# Altium PCB Twintig-Tap-Pads.PcbDoc
Units mm, origin at the board's own origin, x right, y up, seen from the top; angles counter-clockwise.
Board outline 200 x 100 mm, 4 copper layers (Top Layer, Int1 (GND), Int2 (PWR), Bottom Layer), stack 1.369 mm thick; 70 components, 41 nets, 257 pads, 101 vias.
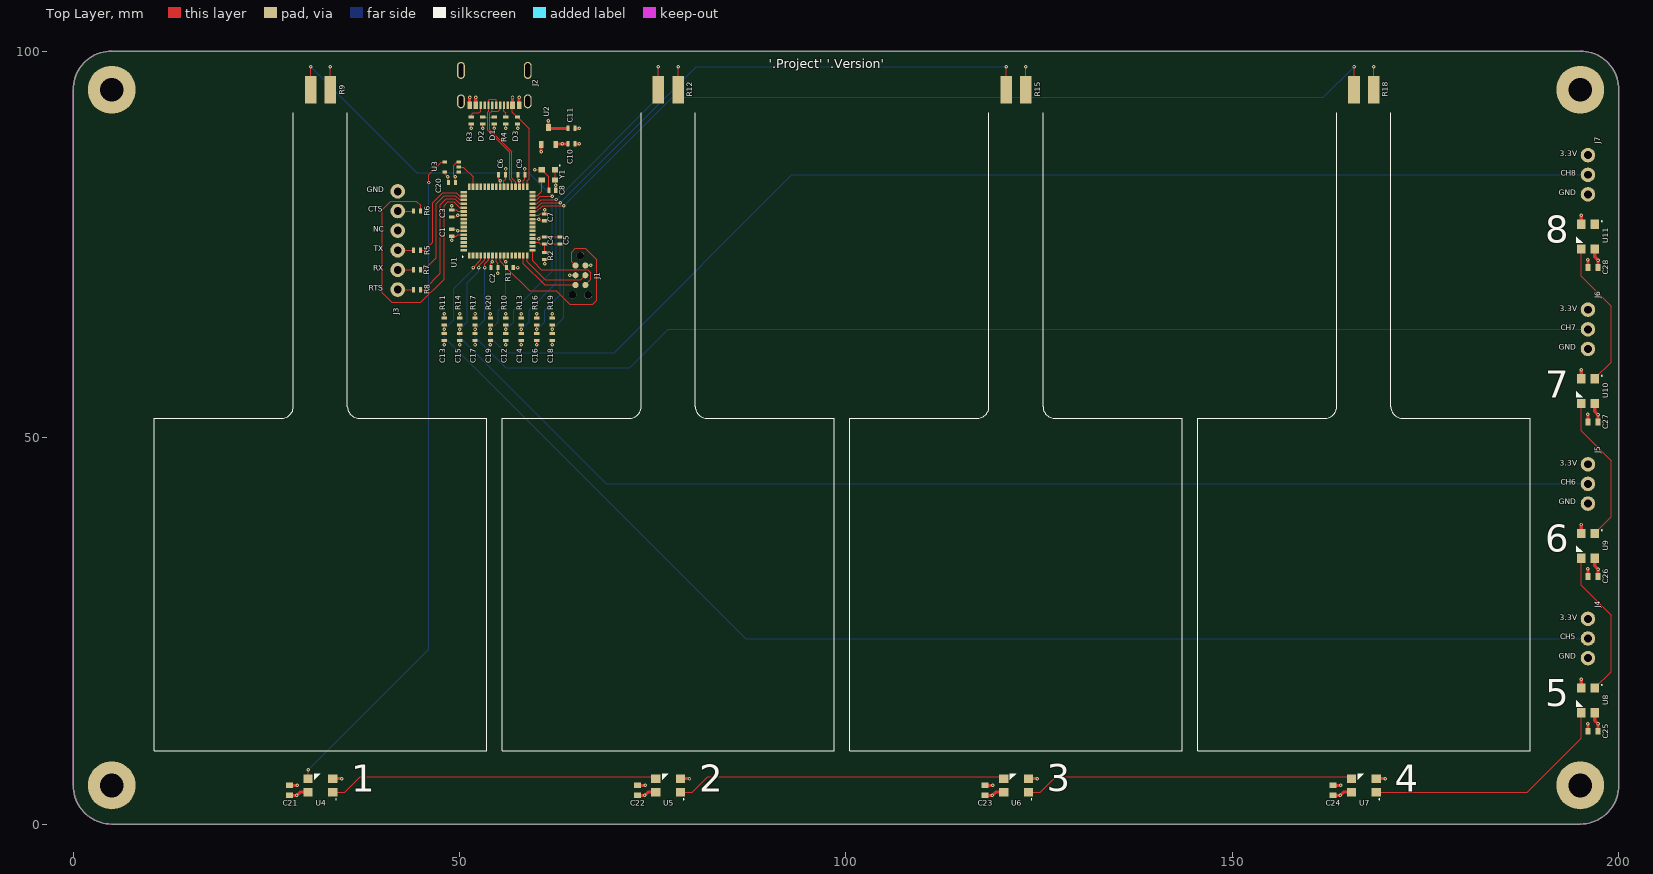
[diagram p0: Top Layer view]
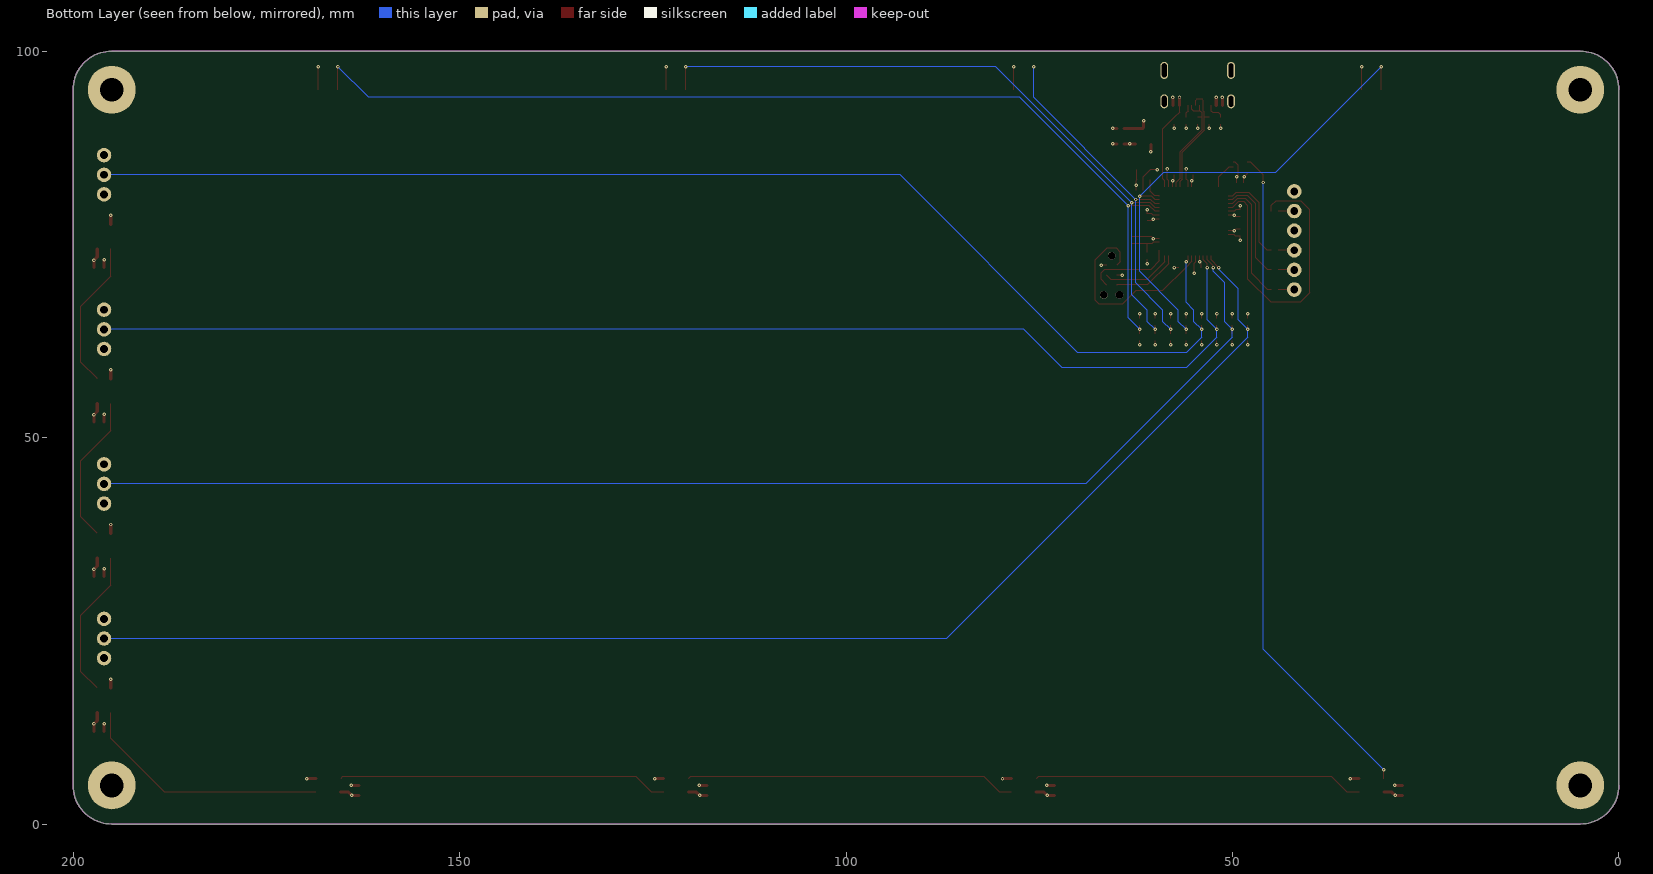
[diagram p1: Bottom Layer view, seen from below]
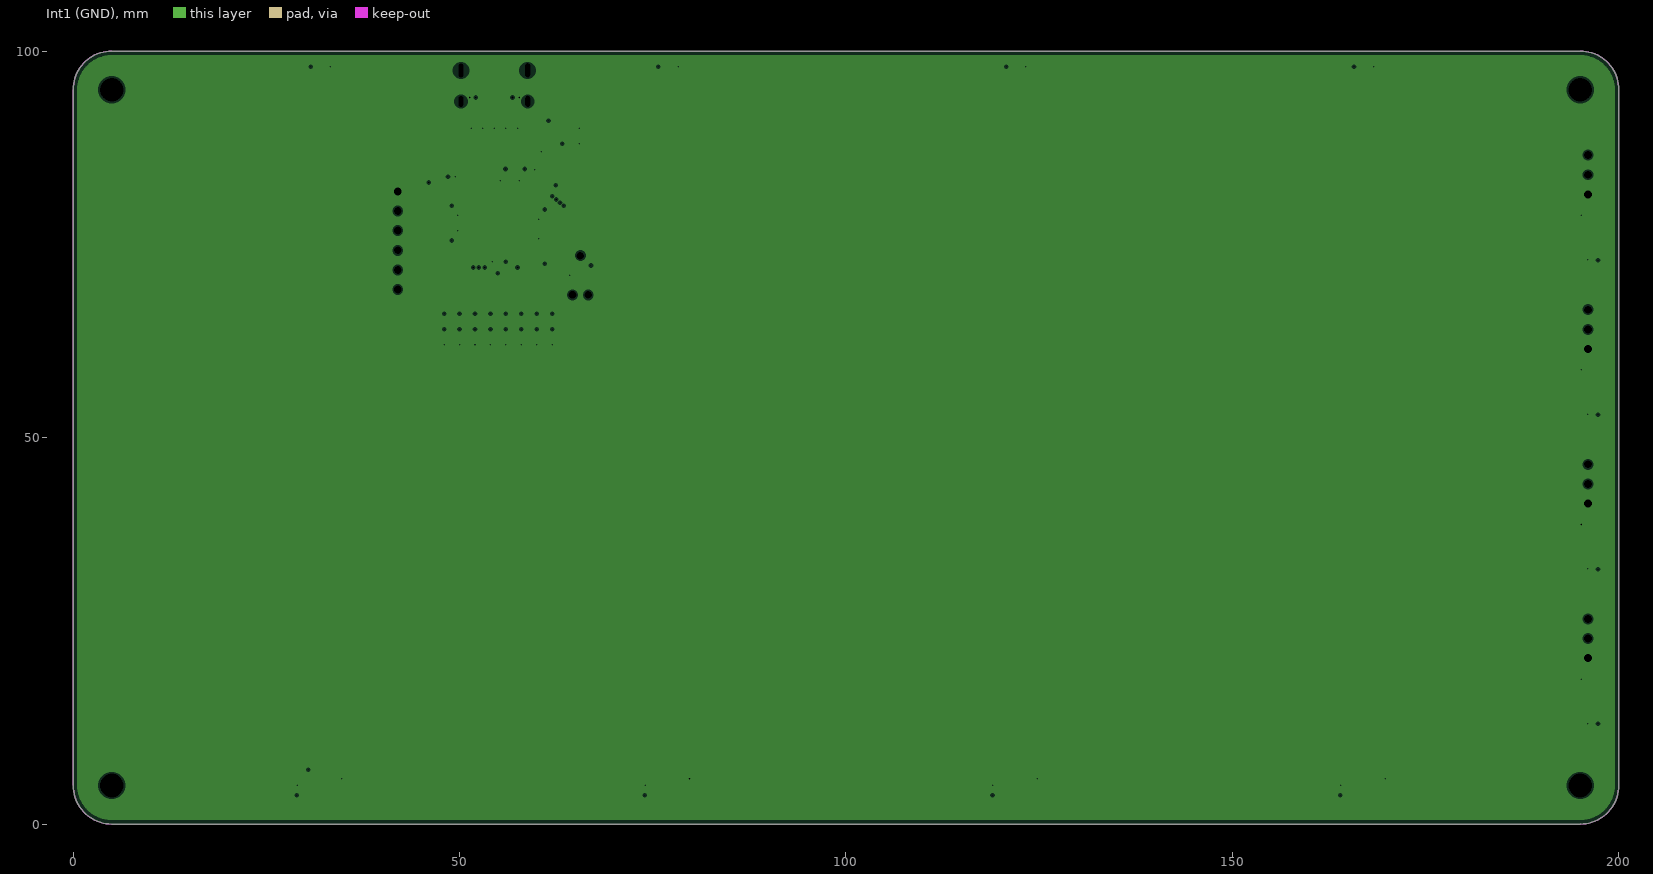
[diagram p2: Int1 (GND), clearances drawn from the general rule]
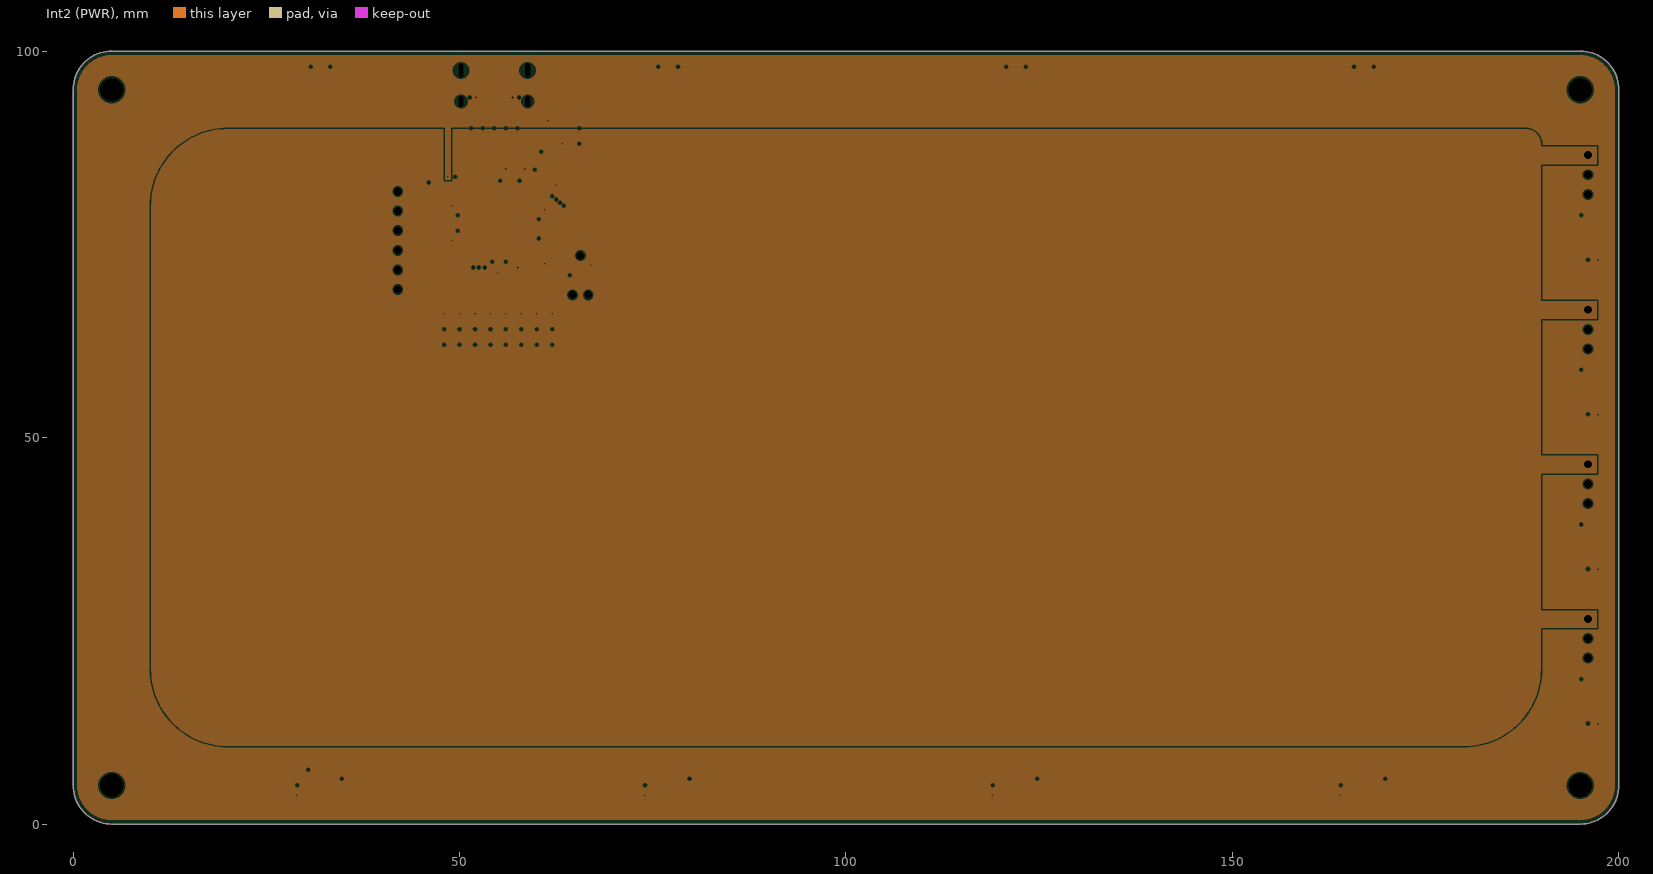
[diagram p3: Int2 (PWR), clearances drawn from the general rule]
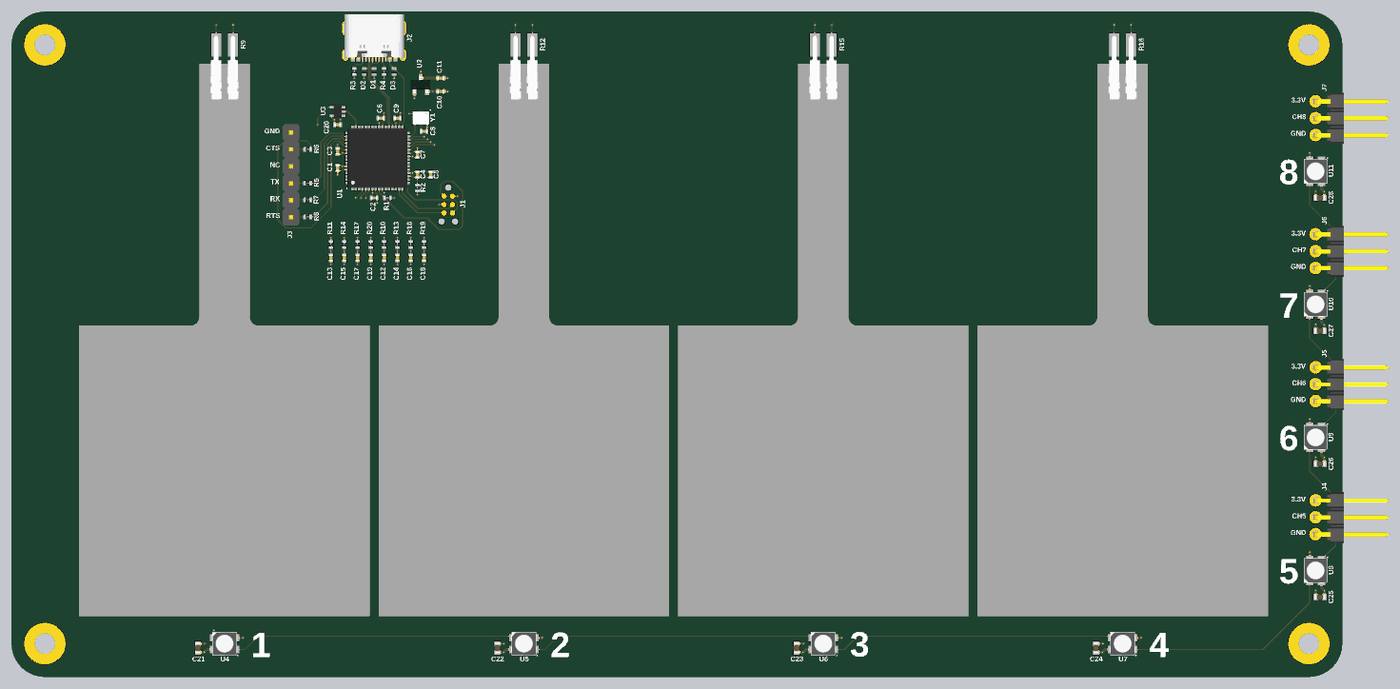
[diagram p4: 3D render of the assembled board from above, using the file's embedded part models]

## Layer stack, top to bottom
Top Solder: solder mask 0.0254, SM-001, Dk 4
Top Layer: signal copper 0.035
Dielectric 1: prepreg 0.1295, PP-017, Dk 4.3
Dielectric 2: prepreg 0.1295, PP-017, Dk 4.3
Int1 (GND): plane copper 0.035, net GND
Dielectric 3: core 0.7112, Core-039, Dk 4.8
Int2 (PWR): plane copper 0.035, net (Multiple Nets)
Dielectric 4: prepreg 0.1295, PP-017, Dk 4.3
Dielectric 5: prepreg 0.1295, PP-017, Dk 4.3
Bottom Layer: signal copper 0.035
Bottom Solder: solder mask 0.0254, SM-001, Dk 4

## Board outline
0,5 0,95 cw(c5,95) 5,100 195,100 cw(c195,95) 200,95 200,5 cw(c195,5) 195,0 5,0 cw(c5,5)

## Design rules (kind name [scope] priority, off if disabled: settings)
Clearance [All] p1: gap=0.1 ignorepadtopadclearanceinfootprint=FALSE except(0: Arc-Hole Track-Hole SMDPad-Hole THPad-Hole Via-Hole Fill-Hole Poly-Hole Region-Hole Text-Hole)
DiffPairsRouting [All] p1: maxlimit=0.254 minlimit=0.1 mostfreqgap=0.1 toplayer_minwidth=0.1 toplayer_maxwidth=0.381 toplayer_prefwidth=0.1 bottomlayer_minwidth=0.1 bottomlayer_maxwidth=0.381 bottomlayer_prefwidth=0.1 maxuncoupledlength=12.7
HoleSize [All] p1: absolutevalues=TRUE maxlimit=10 minlimit=0.025 maxpercent=80.000 minpercent=20.000
MinimumSolderMaskSliver [All] p1: minsoldermaskwidth=0
PlaneClearance [All] p1: clearance=0.2
PlaneConnect [All] p1: planeconnectstyle=Direct reliefexpansion=0.508 reliefentries=4 reliefconductorwidth=0.254 reliefairgap=0.254
PolygonConnect [All] p1: thpad.connectstyle=Relief thpad.reliefconductorwidth=0.254 thpad.reliefentries=4 thpad.polygonreliefangle="90 Angle" thpad.airgapwidth=0.1 smdpad.connectstyle=Relief smdpad.reliefconductorwidth=0.254 smdpad.reliefentries=4 smdpad.polygonreliefangle="90 Angle" smdpad.airgapwidth=0.1 via.connectstyle=Direct via.reliefconductorwidth=0.254 via.reliefentries=4 via.polygonreliefangle="90 Angle" via.airgapwidth=0.254
RoutingVias [All] p1: holewidth=0.711 width=1.27 viastyle="Through Hole" minholewidth=0.15 minwidth=0.35 maxholewidth=0.711 maxwidth=1.27
SilkToSolderMaskClearance [IsPad] p1: minsilkscreentomaskgap=0.1 clearancetoexposedcopper=TRUE
SolderMaskExpansion [All] p1: expansion=0.102 istentingtop=FALSE
SupplyNets "Schematic Supply Nets_4" [InNet('GND')] p1: voltage=0.000
SupplyNets "Schematic Supply Nets_1" [InNet('3.3V')] p2: voltage=0.000
SupplyNets "Schematic Supply Nets" [InNet('VBUS')] p3: voltage=0.000
Width [All] p1: maxlimit=1 minlimit=0.05 preferedwidth=0.1
24 further rules are at their usual default settings.

## Classes and differential pairs
component class "Serial Header": J3 R5 R6 R7 R8
component class LEDs: C20 C21 C22 C23 C24 C25 C26 C27 C28 U3 U4 U5 U6 U7 U8 U9 U10 U11
component class USB-C: D1 D2 D3 J2 R3 R4
component class PIC32MZ: C1 C2 C3 C4 C5 C6 C7 C8 C9 J1 R1 R2 U1 Y1
component class FSRs: C12 C13 C14 C15 C16 C17 C18 C19 J4 J5 J6 J7 R9 R10 R11 R12 R13 R14 R15 R16 R17 R18 R19 R20
component class "Voltage Regulator": C10 C11 U2
differential pair D: +D_P -D_N

## Components (designator, comment, footprint, x,y, rotation, side; value= is the part's Value field where it differs from the comment)
C1 "100nF" "Capacitor 0402" 49,76.5 r270 top
C2 "100nF" "Capacitor 0402" 54.5,72 r180 top
C3 "100nF" "Capacitor 0402" 49,79 r270 top
C4 "10uF" "Capacitor 0402" 61,75.5 r270 top
C5 "100nF" "Capacitor 0402" 63,75.5 r270 top
C6 "100nF" "Capacitor 0402" 55.5,84 r180 top
C7 "100nF" "Capacitor 0402" 61,78.5 r270 top
C8 "100nF" "Capacitor 0402" 62,82 r0 top
C9 "100nF" "Capacitor 0402" 58,84 r180 top
C10 "10uF" "Capacitor 0402" 64.5,88 r180 top
C11 "10uF" "Capacitor 0402" 64.5,90 r180 top
C12 "220pF" "Capacitor 0402" 56,63 r90 top
C13 "220pF" "Capacitor 0402" 48,63 r90 top
C14 "220pF" "Capacitor 0402" 58,63 r90 top
C15 "220pF" "Capacitor 0402" 50,63 r90 top
C16 "220pF" "Capacitor 0402" 60,63 r90 top
C17 "220pF" "Capacitor 0402" 52,63 r90 top
C18 "220pF" "Capacitor 0402" 62,63 r90 top
C19 "220pF" "Capacitor 0402" 54,63 r90 top
C20 "100nF" "Capacitor 0402" 49,83 r180 top
C21 "10uF" "Capacitor 0603" 28,4.35 r270 top
C22 "10uF" "Capacitor 0603" 73,4.35 r270 top
C23 "10uF" "Capacitor 0603" 118,4.35 r270 top
C24 "10uF" "Capacitor 0603" 163,4.35 r270 top
C25 "10uF" "Capacitor 0603" 196.65,12 r0 top
C26 "10uF" "Capacitor 0603" 196.65,32 r0 top
C27 "10uF" "Capacitor 0603" 196.65,52 r0 top
C28 "10uF" "Capacitor 0603" 196.65,72 r0 top
D1 "SP0402B-ULC-01ETG" "Diode TVS 0402" 54.5,91 r270 top
D2 "SP0402B-ULC-01ETG" "Diode TVS 0402" 53,91 r270 top
D3 "SP0402B-ULC-01ETG" "Diode TVS 0402" 57.5,91 r270 top
J1 "DNP" "Tag Connect No Legs" 65.635,73.54 r270 top
J2 "Molex 217179-0001" "Molex 217179-0001" 54.5,97.5 r180 top
J3 "Molex 90121-0766" "Molex 90120-0926" 42,75.5 r0 top
J4 "Molex 90121-0763" "Molex 90121-0763" 196,21.46 r180 top
J5 "Molex 90121-0763" "Molex 90121-0763" 196,41.46 r180 top
J6 "Molex 90121-0763" "Molex 90121-0763" 196,61.46 r180 top
J7 "Molex 90121-0763" "Molex 90121-0763" 196,81.46 r180 top
R1 "10kR" "Resistor 0402" 56.5,72 r0 top
R2 "33R" "Resistor 0402" 61,73.5 r270 top
R3 "5.1kR" "Resistor 0402" 51.5,91 r90 top
R4 "5.1kR" "Resistor 0402" 56,91 r90 top
R5 "470R" "Resistor 0402" 44.5,74.23 r0 top
R6 "470R" "Resistor 0402" 44.5,79.31 r0 top
R7 "470R" "Resistor 0402" 44.5,71.69 r0 top
R8 "470R" "Resistor 0402" 44.5,69.15 r0 top
R9 "Interlink FSR 406" "Interlink FSR 406" 32,95 r90 top locked
R10 "100kR" "Resistor 0402" 56,65 r90 top
R11 "100kR" "Resistor 0402" 48,65 r90 top
R12 "Interlink FSR 406" "Interlink FSR 406" 77,95 r90 top locked
R13 "100kR" "Resistor 0402" 58,65 r90 top
R14 "100kR" "Resistor 0402" 50,65 r90 top
R15 "Interlink FSR 406" "Interlink FSR 406" 122,95 r90 top locked
R16 "100kR" "Resistor 0402" 60,65 r90 top
R17 "100kR" "Resistor 0402" 52,65 r90 top
R18 "Interlink FSR 406" "Interlink FSR 406" 167,95 r90 top locked
R19 "100kR" "Resistor 0402" 62,65 r90 top
R20 "100kR" "Resistor 0402" 54,65 r90 top
U1 "PIC32MZ0512EFE064-I/MR" QFN-64 55,78 r90 top
U2 "TPS7A0533PDBZ" SOT-23 61.5,89 r180 top
U3 "SN74LV1T34DCKR" SOT-323-5 49,85 r270 top
U4 "SK6812MINI-012" SK6812MINI-B-012 32,5 r180 top
U5 "SK6812MINI-012" SK6812MINI-B-012 77,5 r180 top
U6 "SK6812MINI-012" SK6812MINI-B-012 122,5 r180 top
U7 "SK6812MINI-012" SK6812MINI-B-012 167,5 r180 top
U8 "SK6812MINI-012" SK6812MINI-B-012 196,16 r270 top
U9 "SK6812MINI-012" SK6812MINI-B-012 196,36 r270 top
U10 "SK6812MINI-012" SK6812MINI-B-012 196,56 r270 top
U11 "SK6812MINI-012" SK6812MINI-B-012 196,76 r270 top
Y1 "ECS-2520MV-240-DN-TR" "ECS 2x2.5mm" 61.5,84 r180 top

## Footprints (in the part's own frame and the unit in brackets; to place one, negate y for a bottom-side part, rotate by r counter-clockwise, add the part's x,y. Pads: shape width x height; smd on the part's side, far side on the other; paste and mask are expansions set on the pad)
"Capacitor 0402" [mm]
  rect 0.4x0.7 smd: 1(-0.45,0) 2(0.45,0)
  body extent -0.5,-0.25 0.5,0.25, height 0.48
"Capacitor 0603" [mm]
  rect 0.7x0.9 smd: 1(-0.65,0) 2(0.65,0)
  body extent -0.8,-0.4 0.8,0.4, height 0.78
"Diode TVS 0402" [mm]
  rect 0.4x0.7 smd: 1(-0.45,0) 2(0.45,0)
  body extent -0.5,-0.3 0.5,0.3, height 0.4
"ECS 2x2.5mm" [mm]
  rect 0.78x0.68 smd: 1(-0.865,-0.665) 2(0.865,-0.665) 3(0.865,0.665) 4(-0.865,0.665)
  silkscreen extent -1.5,-1.25 -1.4,-1.15, body extent -1.25,-1 1.25,1, height 0.82
"Interlink FSR 406" [mm]
  rect 3.5x1.5 smd: 1(0,1.27) 2(0,-1.27)
  silkscreen extent -85.5,-21.5 -3,21.5, body extent -85.88,-21.84 1.36,21.84, height 0.89
"Molex 90120-0926" [mil]
  round 74 hole 40: 1(0,250) 2(0,150) 3(0,50) 4(0,-50) 5(0,-150) 6(0,-250)
  body extent -49,-301 49,299, height 336
"Molex 90121-0763" [mil]
  round 74 hole 40: 1(0,0) 2(0,-100) 3(0,-200)
  body extent -433,-248 13,52, height 142
"Molex 217179-0001" [mm]
  rect 0.6x1 smd: "A1 B12"(-3.2,4.5) "A4 B9"(-2.35,4.5) "B1 A12"(3.2,4.5) "B4 A9"(2.4,4.5)
  rect 0.3x1 smd: A5(-1.25,4.5) A6(-0.25,4.5) A7(0.25,4.5) A8(1.25,4.5) B5(1.75,4.5) B6(0.75,4.5) B7(-0.75,4.5) B8(-1.75,4.5)
  oval 1x1.8 hole 0.6 slot 1.4 at 90 deg: Shell(-4.32,4) Shell(4.32,4)
  oval 1x2.2 hole 0.6 slot 1.8 at 90 deg: Shell(-4.32,0) Shell(4.32,0)
  body extent -4.47,-2.13 4.47,4.63, height 3.27
QFN-64 [mm]
  rect 0.8x0.35 smd: 1(-4.45,3.75) 2(-4.45,3.25) 3(-4.45,2.75) 4(-4.45,2.25) 5(-4.45,1.75) 6(-4.45,1.25) 7(-4.45,0.75) 8(-4.45,0.25) 9(-4.45,-0.25) 10(-4.45,-0.75) 11(-4.45,-1.25) 12(-4.45,-1.75) 13(-4.45,-2.25) 14(-4.45,-2.75) 15(-4.45,-3.25) 16(-4.45,-3.75) 33(4.45,-3.75) 34(4.45,-3.25) 35(4.45,-2.75) 36(4.45,-2.25) 37(4.45,-1.75) 38(4.45,-1.25) 39(4.45,-0.75) 40(4.45,-0.25) 41(4.45,0.25) 42(4.45,0.75) 43(4.45,1.25) 44(4.45,1.75) 45(4.45,2.25) 46(4.45,2.75) 47(4.45,3.25) 48(4.45,3.75)
  rect 0.35x0.8 smd: 17(-3.75,-4.45) 18(-3.25,-4.45) 19(-2.75,-4.45) 20(-2.25,-4.45) 21(-1.75,-4.45) 22(-1.25,-4.45) 23(-0.75,-4.45) 24(-0.25,-4.45) 25(0.25,-4.45) 26(0.75,-4.45) 27(1.25,-4.45) 28(1.75,-4.45) 29(2.25,-4.45) 30(2.75,-4.45) 31(3.25,-4.45) 32(3.75,-4.45) 49(3.75,4.45) 50(3.25,4.45) 51(2.75,4.45) 52(2.25,4.45) 53(1.75,4.45) 54(1.25,4.45) 55(0.75,4.45) 56(0.25,4.45) 57(-0.25,4.45) 58(-0.75,4.45) 59(-1.25,4.45) 60(-1.75,4.45) 61(-2.25,4.45) 62(-2.75,4.45) 63(-3.25,4.45) 64(-3.75,4.45)
  silkscreen extent -4.65,4.55 -4.55,4.65, body extent -4.52,-4.52 4.52,4.52, height 0.9
"Resistor 0402" [mm]
  rect 0.4x0.7 smd: 1(-0.45,0) 2(0.45,0)
  body extent -0.5,-0.25 0.5,0.25, height 0.34
SK6812MINI-B-012 [mm]
  rect 1.2x1.1 smd: 1(-1.6,0.875) 2(-1.6,-0.875) 3(1.6,-0.875) 4(1.6,0.875)
  silkscreen extent -2.05,-1.5 0.8,1.85, body extent -1.95,-1.75 1.95,1.75, height 1
SOT-23 [mm]
  rect 0.6x0.9 smd: 1(0.95,1.1) 2(-0.95,1.1) 3(0,-1.1)
  body extent -1.5,-1.25 1.5,1.25, height 1.06
SOT-323-5 [mm]
  rect 0.35x0.6 smd: 1(0.65,0.9) 2(0,0.9) 3(-0.65,0.9) 4(-0.65,-0.9) 5(0.65,-0.9)
  body extent -1,-1.05 1,1.05, height 0.95
"Tag Connect No Legs" [mil]
  round 31 smd paste-99999: 1(50,-25) 2(50,25) 3(100,-25) 4(100,25) 5(150,-25) 6(150,25)
  round 39 hole 39 unplated: Pin(0,0) Pin(200,-40) Pin(200,40)

## Part data
C1 C2 C3 C4 C5 C6 C7 C8 C9 C10 C11 C12 C13 C14 C15 C16 C17 C18 C19 C20 C21 C22 C23 C24 C25 C26 C27 C28: library part Capacitor
D1 D2 D3: library part "Diode TVS"
J1: library part "MPLAB ICSP"
J2: library part "USB-C Receptacle (16 Pin)"
J3: library part "FTDI Breakout"
R1 R2 R3 R4 R5 R6 R7 R8 R10 R11 R13 R14 R16 R17 R19 R20: library part Resistor
U1: library part PIC32MZ2048EFH064
U3: library part "SN74LVC1xxx (1 Input)"
U4 U5 U6 U7 U8 U9 U10 U11: library part SK6812MINI-B-012
Y1: library part Oscillator

## Free pads (board coordinates)
  round 6.2 hole 3.1: "Mounting Hole"(5,5) "Mounting Hole"(5,95) "Mounting Hole"(195,5) "Mounting Hole"(195,95)

## Via types
v1: diameter 0.45, hole 0.2, Top Layer to Bottom Layer, tented both sides, 101 vias

## Nets (pads, with @x,y where several pads share a name; then routed paths per layer and width w, separated by ;. In a path a pad name is that pad's centre, name@x,y a point inside that pad or via, vN(x,y) a via of type N, cw(c..) or ccw(c..) an arc to the next point about the centre after c; other vN are vias at no path point)
3.3V: C1.2 C2.1 C3.1 C6.1 C7.1 C8.2 C9.1 C10.2 J1.2 J4.3 J5.3 J6.3 J7.3 R1.2 R2.2 R10.2 R11.2 R13.2 R14.2 R16.2 R17.2 R19.2 R20.2 U1.8 U1.26 U1.34 U1.39 U1.54 U1.60 U2.2 Y1.1 Y1.4 | length 24.3
  Top Layer w0.15: R11.2 v1(48,66) ; v1(49,75.5) C1.2 49.55,76.05 49.75,76.25 U1.60 ; v1(49,80) C3.1 49.55,79.45 49.75,79.25 U1.54 ; R14.2 v1(50,66) ; R17.2 v1(52,66) ; R20.2 v1(54,66) ; U1.8 54.75,72.75 54.95,72.55 C2.1 v1(54.95,71.25) ; U1.39 55.75,83.25 55.95,83.45 C6.1 v1(55.95,84.75) ; R10.2 v1(56,66) ; R1.2 v1(57.5,72) ; R13.2 v1(58,66) ; U1.34 58.25,83.25 58.45,83.45 C9.1 v1(58.45,84.75) ; U1.26 60.25,78.75 60.45,78.95 C7.1 v1(61,79.5) ; R16.2 v1(60,66) ; v1(61,72.5) R2.2 ; R19.2 v1(62,66) ; Y1.1 Y1.4 62.45,83.25 C8.2 ; U2.2 U2.2@62.55,88 ; J1.2 v1(67,72.27)
  Top Layer w0.4: U2.2@62.55,88 C10.2
  other v1: 62.45,82.625 63.3,88
AVDD: C4.2 C5.2 R2.1 U1.19 | length 4.7
  Top Layer w0.15: U1.19 60.25,75.25 60.45,75.05 C4.2 R2.1 ; C4.2 C5.2
CC1: J2.A5 R4.2 | length 1.7
  Top Layer w0.15: J2.A5 55.75,92.25 56,92 R4.2
CC2: J2.B5 R3.2 | length 2.5
  Top Layer w0.15: R3.2 51.5,91.75 51.75,92 52.5,92 52.75,92.25 J2.B5
CH1: C12.2 R9.1 R10.1 U1.30 | length 64.8
  Top Layer w0.15: R9.1 v1(30.73,98) ; C12.2 v1(56,64) R10.1 ; U1.30 60,80.75 60.45,81.2 v1(62,81.2)
  Bottom Layer w0.15: v1(30.73,98) 44.48,84.25 58.95,84.25 v1(62,81.2) 62,71.5 57,66.5 57,65 v1(56,64)
CH2: C14.2 R12.1 R13.1 U1.29 | length 48.7
  Top Layer w0.15: C14.2 v1(58,64) R13.1 ; U1.29 60,80.25 60.55,80.8 v1(62.5,80.8) ; R12.1 v1(75.73,98)
  Bottom Layer w0.15: v1(58,64) 59,65 59,66.5 62.5,70 v1(62.5,80.8) 75.73,94.03 v1(75.73,98)
CH3: C16.2 R15.1 R16.1 U1.28 | length 90.6
  Top Layer w0.15: U1.28 60,79.75 60.65,80.4 v1(63,80.4) ; C16.2 v1(60,64) R16.1 ; R15.1 v1(120.73,98)
  Bottom Layer w0.15: v1(60,64) 61,65 61,66.5 63,68.5 v1(63,80.4) 80.6,98 v1(120.73,98)
CH4: C18.2 R18.1 R19.1 U1.27 | length 134.8
  Top Layer w0.15: U1.27 60,79.25 60.75,80 v1(63.5,80) ; C18.2 v1(62,64) R19.1 ; R18.1 v1(165.73,98)
  Bottom Layer w0.15: v1(62,64) 63.5,65.5 v1(63.5,80) 77.5,94 161.73,94 v1(165.73,98)
CH5: C13.2 J4.2 R11.1 U1.4 | length 177.8
  Top Layer w0.15: C13.2 v1(48,64) R11.1 ; v1(51.75,72) 52.75,73 U1.4
  Bottom Layer w0.15: v1(51.75,72) 51.724,71.974 51.724,71.724 49.25,69.25 49.25,65.25 v1(48,64) 48,63 87,24 J4.2
CH6: C15.2 J5.2 R14.1 U1.5 | length 166.9
  Top Layer w0.15: C15.2 v1(50,64) R14.1 ; v1(52.5,72) 52.5,72.25 53.25,73 U1.5
  Bottom Layer w0.15: v1(52.5,72) 52.5,71.5 51,70 51,65 v1(50,64) 50,63 69,44 J5.2
CH7: C17.2 J6.2 R17.1 U1.6 | length 160.1
  Top Layer w0.15: C17.2 v1(52,64) R17.1 ; v1(53.25,72) 53.25,72.5 53.75,73 U1.6
  Bottom Layer w0.15: v1(53.25,72) 53.25,65.25 v1(52,64) 52,63 56,59 72,59 77,64 J6.2
CH8: C19.2 J7.2 R20.1 U1.10 | length 164.9
  Top Layer w0.15: C19.2 v1(54,64) R20.1 ; U1.10 55.75,73 v1(56,72.75)
  Bottom Layer w0.15: v1(56,72.75) 56,67.5 55,66.5 55,65 v1(54,64) 54,63 56,61 70,61 93,84 J7.2
CLKI: U1.31 Y1.3 | length 2.9
  Top Layer w0.15: U1.31 59.475,81.275 60.025,81.275 60.635,81.885 Y1.3
CTS: R8.2 U1.52 | length 15.9
  Top Layer w0.15: R8.2 45.15,69.15 45.4,69.15 47.5,71.25 47.5,80.1 48.3,80.9 49.35,80.9 50,80.25 U1.52
"CTS R": J3.2 R6.1 | length 2.1
  Top Layer w0.15: J3.2 R6.1
D_N: D1.1 J2.A7 J2.B7 U1.36 | length 14.4
  Top Layer w0.15: J2.A7 54.25,92.35 54.15,92.25 ; D1.1 53.9,91.45 ; J2.B7 55.25,92.5 55,92.25 54.15,92.25 ; U1.36 57.25,83.05 56.75,83.55 56.75,87 53.9,89.85 53.9,91.45 ; 53.9,91.45 53.9,92 54.15,92.25
D_P: D2.1 J2.A6 J2.B6 U1.37 | length 14.9
  Top Layer w0.15: D2.1 53.6,91.45 53.65,91.5 ; J2.A6 54.75,93.662 54.662,93.75 53.838,93.75 53.75,93.662 J2.B6 53.75,92.25 53.65,92.15 53.65,91.5 ; U1.37 56.75,83.15 56.5,83.4 56.5,86.896 53.65,89.746 53.65,91.5
Debug: J1.6 U1.17 | length 11.5
  Top Layer w0.15: U1.17 59.45,72.85 60.599,71.701 66.599,71.701 67,71.3 67,70.46 J1.6
DOUT1: U4.1 U5.3 | length 42.7
  Top Layer w0.15: U4.1 35.125,4.125 37.125,6.125 75.15,6.125 U5.3
DOUT2: U5.1 U6.3 | length 42.7
  Top Layer w0.15: U5.1 80.125,4.125 82.125,6.125 120.15,6.125 U6.3
DOUT3: U6.1 U7.3 | length 42.7
  Top Layer w0.15: U6.1 125.125,4.125 127.125,6.125 165.15,6.125 U7.3
DOUT4: U7.1 U8.3 | length 32.7
  Top Layer w0.15: U7.1 188.125,4.125 195.125,11.125 U8.3
DOUT5: U8.1 U9.3 | length 19.3
  Top Layer w0.15: U9.3 195.125,30.875 199,27 199,19.725 U8.1
DOUT6: U9.1 U10.3 | length 19.3
  Top Layer w0.15: U10.3 195.125,50.875 199,47 199,39.725 U9.1
DOUT7: U10.1 U11.3 | length 19.3
  Top Layer w0.15: U11.3 195.125,70.875 199,67 199,59.775 196.875,57.65 U10.1
GND: "J2.A1 B12" "J2.B1 A12" C1.1 C2.2 C3.2 C4.1 C5.1 C6.2 C7.2 C8.1 C9.2 C10.1 C11.1 C12.1 C13.1 C14.1 C15.1 C16.1 C17.1 C18.1 C19.1 C20.1 C21.1 C22.1 C23.1 C24.1 C25.1 C26.1 C27.1 C28.1 D1.2 D2.2 D3.2 J1.3 J3.1 J4.1 J5.1 J6.1 J7.1 R3.1 R4.1 R9.2 R12.2 R15.2 R18.2 U1.7 U1.20 U1.25 U1.35 U1.40 U1.55 U1.59 U2.1 U3.3 U4.2 U5.2 U6.2 U7.2 U8.2 U9.2 U10.2 U11.2 Y1.2 | length 61.6
  Top Layer w0.15: R9.2 v1(33.27,98) ; v1(48,62) C13.1 ; C1.1 49.55,76.95 v1(49.75,76.75) U1.59 ; C3.2 49.55,78.55 v1(49.75,78.75) U1.55 ; C20.1 v1(49.45,83.75) 49.25,83.95 49.25,85.25 49.65,85.65 U3.3 ; v1(50,62) C15.1 ; v1(51.5,90) R3.1 ; v1(52,62) C17.1 ; v1(53,90) D2.2 ; v1(54,62) C19.1 ; C2.2 54.05,72.55 v1(54.25,72.75) U1.7 ; v1(54.5,90) D1.2 ; C6.2 55.05,83.45 v1(55.25,83.25) U1.40 ; v1(56,62) C12.1 ; v1(56,90) R4.1 ; v1(57.5,90) D3.2 ; C9.2 57.55,83.45 v1(57.75,83.25) U1.35 ; v1(58,62) C14.1 ; U1.20 v1(60.25,75.75) 60.45,75.95 C4.1 ; U1.25 v1(60.25,78.25) 60.45,78.05 C7.2 ; v1(59.75,84.665) Y1.2 61.55,83.75 C8.1 ; v1(60,62) C16.1 ; C4.1 C5.1 ; v1(62,62) C18.1 ; v1(64.25,71) J1.3 ; R12.2 v1(78.27,98) ; R15.2 v1(123.27,98) ; R18.2 v1(168.27,98)
  Top Layer w0.4: C21.1 v1(29,5) ; U4.2 v1(34.75,5.875) ; 51.3,93 v1(51.3,94) ; 57.7,93 v1(57.7,94) ; v1(60.55,87) U2.1 ; C10.1 v1(65.5,88) ; C11.1 v1(65.5,90) ; C22.1 v1(74,5) ; U5.2 v1(79.75,5.875) ; C23.1 v1(119,5) ; U6.2 v1(124.75,5.875) ; C24.1 v1(164,5) ; U7.2 v1(169.75,5.875) ; U8.2 v1(195.125,18.75) ; U9.2 v1(195.125,38.75) ; U10.2 v1(195.125,58.75) ; U11.2 v1(195.125,78.75) ; C25.1 v1(196,13) ; C26.1 v1(196,33) ; C27.1 v1(196,53) ; C28.1 v1(196,73)
MCLR: J1.1 R1.1 U1.9 | length 27
  Top Layer w0.15: U1.9 55.25,72.8 R1.1 59.05,69 62.5,69 64.25,67.25 67.25,67.25 67.75,67.75 67.75,73 66.25,74.5 65,74.5 64.5,74 64.5,72.77 J1.1
PGEC: J1.5 U1.15 | length 8.9
  Top Layer w0.15: U1.15 58.25,72.5 61,69.75 64.98,69.75 J1.5
PGED: J1.4 U1.16 | length 9.5
  Top Layer w0.15: U1.16 58.75,72.75 61.1,70.4 65.67,70.4 J1.4
RF3: U1.38
RGB: U1.47 U3.2 | length 3.7
  Top Layer w0.15: U3.2 50.5,85 51.75,83.75 51.75,83.25 U1.47
"RGB 5V": U3.4 U4.3 | length 87.4
  Top Layer w0.15: U4.3 v1(30.4,7) ; v1(46,83) 46,84 47.65,85.65 U3.4
  Bottom Layer w0.15: v1(30.4,7) 46,22.6 v1(46,83)
"RGB SCK": U1.49
"RGB SDI": U1.48
RTS: R6.2 U1.53 | length 39.5
  Top Layer w0.15: R6.2 44.95,80.05 44.4,80.6 41.1,80.6 40,79.5 40,68.75 41.25,67.5 45,67.5 48,70.5 48,80 48.5,80.5 49.25,80.5 50,79.75 U1.53
"RTS R": J3.6 R8.1 | length 2.1
  Top Layer w0.15: J3.6 R8.1
RX: R5.2 U1.50 | length 11.9
  Top Layer w0.15: R5.2 45.48,74.23 46.5,75.25 46.5,80.4 47.8,81.7 49.55,81.7 50,81.25 U1.50
"RX R": J3.5 R7.1 | length 2.1
  Top Layer w0.15: J3.5 R7.1
TX: R7.2 U1.51 | length 13.9
  Top Layer w0.15: R7.2 45.44,71.69 47,73.25 47,80.25 48.05,81.3 49.45,81.3 50,80.75 U1.51
"TX R": J3.4 R5.1 | length 2.1
  Top Layer w0.15: J3.4 R5.1
VBUS: "J2.A4 B9" "J2.B4 A9" C11.2 C20.2 C21.2 C22.2 C23.2 C24.2 C25.2 C26.2 C27.2 C28.2 D3.1 U1.33 U2.3 U3.5 U4.4 U5.4 U6.4 U7.4 U8.4 U9.4 U10.4 U11.4 | length 39.2
  Top Layer w0.15: U3.5 48.1,84.15 48.55,83.7 C20.2 ; 56.85,93 56.85,92.1 D3.1 59,89.95 59,83.5 58.75,83.25 U1.33 ; U2.3 U2.3@61.6,90
  Top Layer w0.4: C21.2 v1(28.95,3.7) 29.375,4.125 U4.4 ; 52.1,93 v1(52.1,94) ; 56.85,93 v1(56.85,94) ; U2.3 v1(61.5,91) ; U2.3@61.6,90 C11.2 ; C22.2 v1(73.95,3.7) 74.375,4.125 U5.4 ; C23.2 v1(118.95,3.7) 119.375,4.125 U6.4 ; C24.2 v1(163.95,3.7) 164.375,4.125 U7.4 ; U8.4 196.875,13.375 v1(197.3,12.95) C25.2 ; U9.4 196.875,33.375 v1(197.3,32.95) C26.2 ; U10.4 196.875,53.375 v1(197.3,52.95) C27.2 ; U11.4 196.875,73.375 v1(197.3,72.95) C28.2
  other v1: 48.5,83.75
pads on no net: J1.Pin J2.A8 J2.B8 J2.Shell J3.3 U1.1 U1.2 U1.3 U1.11 U1.12 U1.13 U1.14 U1.18 U1.21 U1.22 U1.23 U1.24 U1.32 U1.41 U1.42 U1.43 U1.44 U1.45 U1.46 U1.56 U1.57 U1.58 U1.61 U1.62 U1.63 U1.64 U3.1 U11.1

## Polygon pours and split planes (outlines as drawn)
GND on Int1 (GND) (split plane): 195.294,99.482 195.586,99.453 195.876,99.406 196.163,99.339 196.444,99.253 196.719,99.15 196.987,99.029 197.246,98.89 197.496,98.735 197.734,98.564 197.962,98.377 198.176,98.176 198.377,97.962 198.564,97.734 198.735,97.496 198.89,97.246 199.029,96.987 199.15,96.719 199.253,96.444 199.339,96.163 199.406,95.876 199.453,95.586 199.482,95.294 199.491,95.018 199.49,95 199.49,5 199.491,4.982 199.482,4.706 199.453,4.414 199.406,4.124 199.339,3.837 199.253,3.556 199.15,3.281 199.029,3.013 198.89,2.754 198.735,2.504 198.564,2.266 198.377,2.038 198.176,1.824 197.962,1.623 197.734,1.436 197.496,1.265 197.246,1.11 196.987,0.971 196.719,0.85 196.444,0.747 196.163,0.661 195.876,0.594 195.586,0.547 195.294,0.518 195.018,0.509 195,0.51 5,0.51 4.982,0.509 4.706,0.518 4.414,0.547 4.124,0.594 3.837,0.661 3.556,0.747 3.281,0.85 3.013,0.971 2.754,1.11 2.504,1.265 2.266,1.436 2.038,1.623 1.824,1.824 1.623,2.038 1.436,2.266 1.265,2.504 1.11,2.754 0.971,3.013 0.85,3.281 0.747,3.556 0.661,3.837 0.594,4.124 0.547,4.414 0.518,4.706 0.509,4.982 0.51,5 0.51,95 0.509,95.018 0.518,95.294 0.547,95.586 0.594,95.876 0.661,96.163 0.747,96.444 0.85,96.719 0.971,96.987 1.11,97.246 1.265,97.496 1.436,97.734 1.623,97.962 1.824,98.176 2.038,98.377 2.266,98.564 2.504,98.735 2.754,98.89 3.013,99.029 3.281,99.15 3.556,99.253 3.837,99.339 4.124,99.406 4.414,99.453 4.706,99.482 4.982,99.491 5,99.49 195,99.49 195.018,99.491
VBUS on Int2 (PWR) (split plane): 195.294,99.482 195.586,99.453 195.876,99.406 196.163,99.339 196.444,99.253 196.719,99.15 196.987,99.029 197.246,98.89 197.496,98.735 197.734,98.564 197.962,98.377 198.176,98.176 198.377,97.962 198.564,97.734 198.735,97.496 198.89,97.246 199.029,96.987 199.15,96.719 199.253,96.444 199.339,96.163 199.406,95.876 199.453,95.586 199.482,95.294 199.491,95.018 199.49,95 199.49,5 199.491,4.982 199.482,4.706 199.453,4.414 199.406,4.124 199.339,3.837 199.253,3.556 199.15,3.281 199.029,3.013 198.89,2.754 198.735,2.504 198.564,2.266 198.377,2.038 198.176,1.824 197.962,1.623 197.734,1.436 197.496,1.265 197.246,1.11 196.987,0.971 196.719,0.85 196.444,0.747 196.163,0.661 195.876,0.594 195.586,0.547 195.294,0.518 195.018,0.509 195,0.51 5,0.51 4.982,0.509 4.706,0.518 4.414,0.547 4.124,0.594 3.837,0.661 3.556,0.747 3.281,0.85 3.013,0.971 2.754,1.11 2.504,1.265 2.266,1.436 2.038,1.623 1.824,1.824 1.623,2.038 1.436,2.266 1.265,2.504 1.11,2.754 0.971,3.013 0.85,3.281 0.747,3.556 0.661,3.837 0.594,4.124 0.547,4.414 0.518,4.706 0.509,4.982 0.51,5 0.51,95 0.509,95.018 0.518,95.294 0.547,95.586 0.594,95.876 0.661,96.163 0.747,96.444 0.85,96.719 0.971,96.987 1.11,97.246 1.265,97.496 1.436,97.734 1.623,97.962 1.824,98.176 2.038,98.377 2.266,98.564 2.504,98.735 2.754,98.89 3.013,99.029 3.281,99.15 3.556,99.253 3.837,99.339 4.124,99.406 4.414,99.453 4.706,99.482 4.982,99.491 5,99.49 195,99.49 195.018,99.491
3.3V on Int2 (PWR) (split plane): 197 vertices, not listed, extent 10.1,10.1 197.148,89.9

## Keep-outs
Keep-Out Layer:
  the board outline again, w0.1

## Other copper
Int2 (PWR) (plane layer: these items are gaps in the copper):
  lines w0.2: 10,20 ccw(c20,20) 20,10 180,10 ccw(c180,20) 190,20 190,25.25 197.25,25.25 197.25,27.75 190,27.75 190,45.25 197.25,45.25 197.25,47.75 190,47.75 190,65.25 197.25,65.25 197.25,67.75 190,67.75 190,85.25 197.25,85.25 197.25,87.75 190,87.75 190,88 ccw(c188,88) 188,90 49,90 49,83.25 48,83.25 48,90 20,90 ccw(c20,80) 10,80 10,20

## Silkscreen, mask and mechanical layers (free items; w line width, h text height)
Top Overlay:
  text "'.Project' '.Version'" at 89.983,97.377 h2
  text "3.3V" at 192.339,86.122 h1.2
  text "CH8" at 192.458,83.617 h1.2
  text "GND" at 37.976,81.467 h1.2
  text "GND" at 192.226,81.117 h1.2
  text "CTS" at 38.212,78.927 h1.2
  text "NC" at 38.838,76.387 h1.2
  text "8" at 190.5,74.069 h6
  text "TX" at 38.908,73.847 h1.2
  text "RX" at 38.844,71.307 h1.2
  text "RTS" at 38.24,68.767 h1.2
  text "3.3V" at 192.362,66.113 h1.2
  text "CH7" at 192.48,63.608 h1.2
  text "GND" at 192.249,61.108 h1.2
  text "7" at 190.5,54 h6
  text "3.3V" at 192.339,46.122 h1.2
  text "CH6" at 192.448,43.617 h1.2
  text "GND" at 192.226,41.117 h1.2
  text "6" at 190.5,34.067 h6
  text "3.3V" at 192.339,26.122 h1.2
  text "CH5" at 192.442,23.617 h1.2
  text "GND" at 192.226,21.117 h1.2
  text "5" at 190.5,14.067 h6
  text "3" at 126,3.067 h6
  text "1" at 36,3 h6
  text "2" at 81,3 h6
  text "4" at 171,3 h6